# Altium PCB PCB3.PcbDoc (part 2 of 3)
Units mil, origin at the board's own origin, x right, y up, seen from the top; angles counter-clockwise.
Board outline 3693.31 x 2873.7 mil, 2 copper layers (Top Layer, Bottom Layer); 240 components, 0 nets, 816 pads, 396 vias.
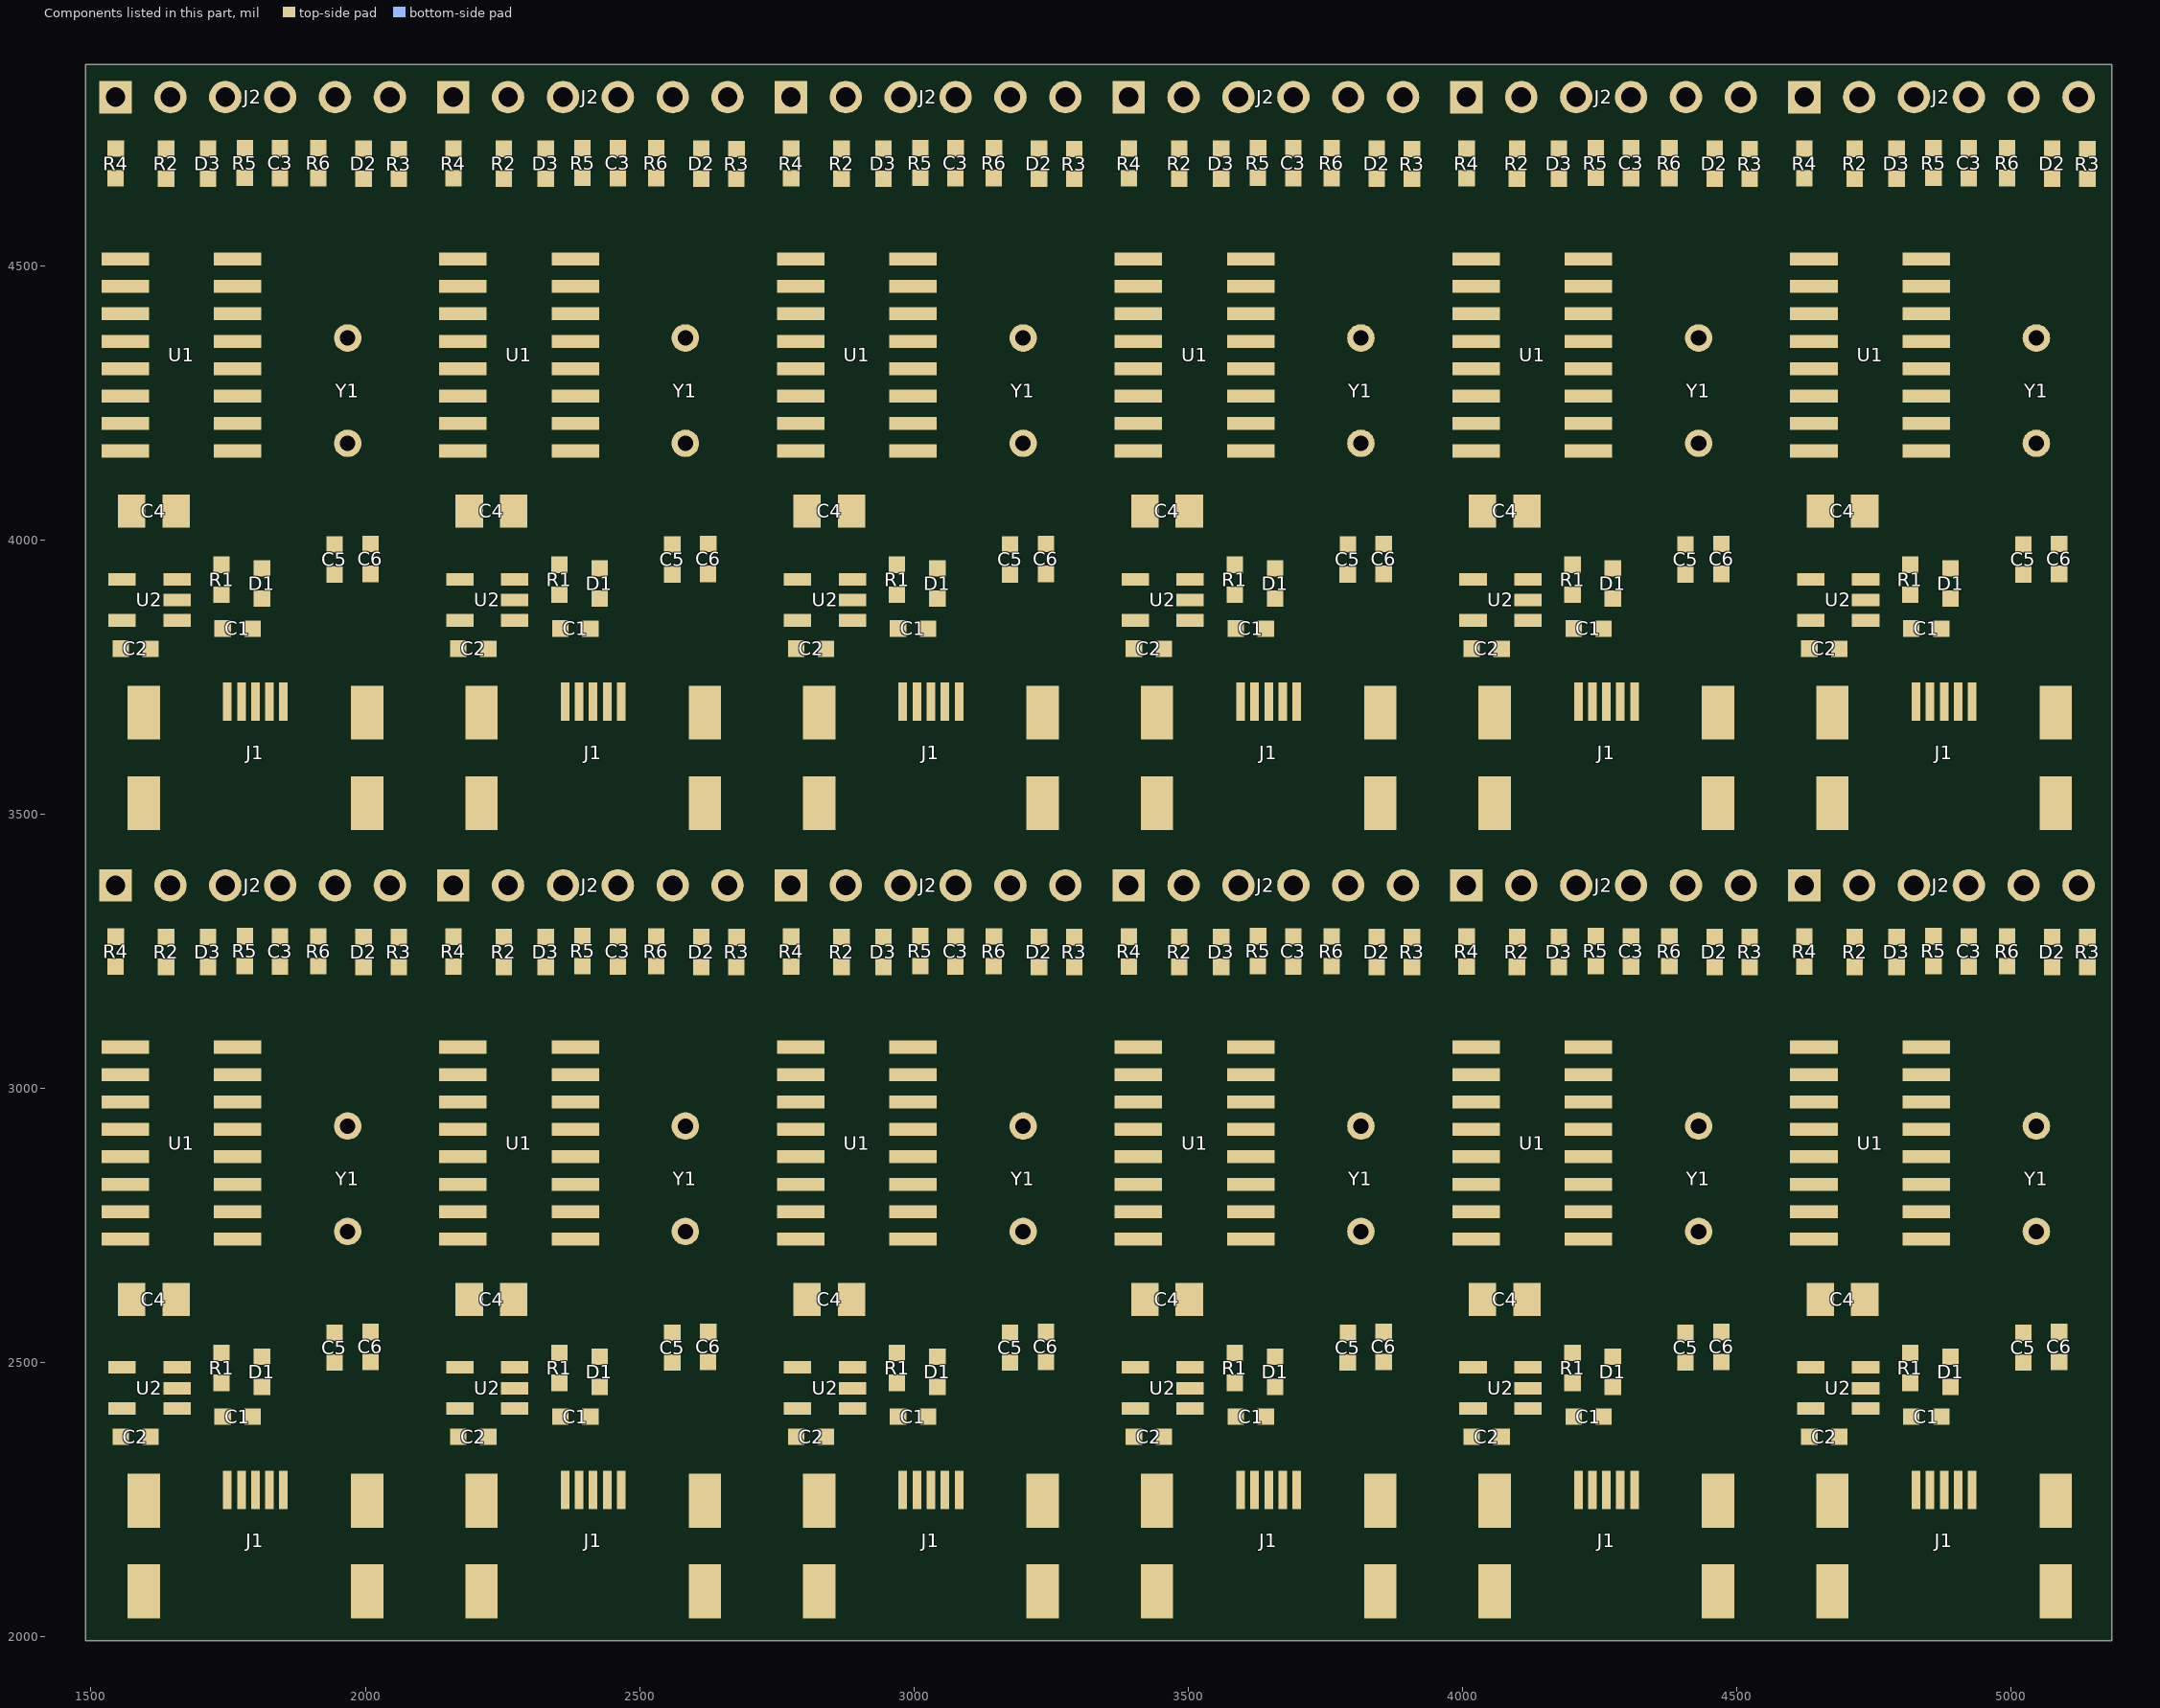
[diagram p2: the components of this part, seen from the top]

## Via types
v1: diameter 20, hole 10, Top Layer to Bottom Layer, tented both sides, 348 vias
v2: diameter 30, hole 15, Top Layer to Bottom Layer, tented both sides, 48 vias

## Nets (pads, with @x,y where several pads share a name; then routed paths per layer and width w, separated by ;. In a path a pad name is that pad's centre, name@x,y a point inside that pad or via, vN(x,y) a via of type N, cw(c..) or ccw(c..) an arc to the next point about the centre after c; other vN are vias at no path point) (continued)
copper on no net: | length 126987.4
  Top Layer w10: 1713.22,3221.43 1713.22,3205.38 1638.84,3131 1638.84,2801 1664.63,2775.22 1767.13,2775.22 ; 1713.22,4658.28 1713.22,4642.22 1638.84,4567.85 1638.84,4237.85 1664.63,4212.06 1767.13,4212.06 ; 1767.13,2825.22 1679.76,2825.22 1662.01,2842.97 1662.01,3117.01 1715.18,3170.18 1891.05,3170.18 1914.47,3193.59 1914.47,3222.65 ; 1767.13,2875.22 1708.16,2875.22 1684.51,2898.87 1684.51,3102.01 1722,3139.5 v1(1873.07,3139.5) ; 1767.13,2925.22 1859.94,2925.22 1883.5,2901.65 1883.5,2351.8 1872.36,2340.66 1811.2,2340.66 1799.74,2329.2 1799.74,2268.13 ; 1767.13,2975.22 1768.92,2977.01 v2(1834.63,2977.01) ; 1767.13,4262.06 1679.76,4262.06 1662.01,4279.82 1662.01,4553.85 1715.18,4607.02 1891.05,4607.02 1914.47,4630.44 1914.47,4659.5 ; 1767.13,4312.06 1708.16,4312.06 1684.51,4335.72 1684.51,4538.86 1722,4576.35 v1(1873.07,4576.35) ; 1767.13,4362.06 1859.94,4362.06 1883.5,4338.5 1883.5,3788.65 1872.36,3777.51 1811.2,3777.51 1799.74,3766.05 1799.74,3704.97 ; 1767.13,4412.06 1768.92,4413.86 v2(1834.63,4413.86) ; 1774.15,2268.13 1774.15,2351.97 1787.44,2365.25 1835.92,2365.25 1852.67,2382 v1(1852.67,2896.03) ; 1774.15,3704.97 1774.15,3788.82 1787.44,3802.1 1835.92,3802.1 1852.67,3818.85 v1(1852.67,4332.88) ; 1844.57,3222.46 1848,3219.03 v1(1873.45,3219.03) ; 1844.57,4659.31 1848,4655.87 v1(1873.45,4655.87) ; 2328.77,3221.43 2328.77,3205.38 2254.39,3131 2254.39,2801 2280.18,2775.22 2382.68,2775.22 ; 2328.77,4658.28 2328.77,4642.22 2254.39,4567.85 2254.39,4237.85 2280.18,4212.06 2382.68,4212.06 ; 2382.68,2825.22 2295.32,2825.22 2277.56,2842.97 2277.56,3117.01 2330.73,3170.18 2506.6,3170.18 2530.02,3193.59 2530.02,3222.65 ; 2382.68,2875.22 2323.71,2875.22 2300.06,2898.87 2300.06,3102.01 2337.55,3139.5 v1(2488.62,3139.5) ; 2382.68,2925.22 2475.49,2925.22 2499.06,2901.65 2499.06,2351.8 2487.91,2340.66 2426.75,2340.66 2415.3,2329.2 2415.3,2268.13 ; 2382.68,2975.22 2384.48,2977.01 v2(2450.18,2977.01) ; 2382.68,4262.06 2295.32,4262.06 2277.56,4279.82 2277.56,4553.85 2330.73,4607.02 2506.6,4607.02 2530.02,4630.44 2530.02,4659.5 ; 2382.68,4312.06 2323.71,4312.06 2300.06,4335.72 2300.06,4538.86 2337.55,4576.35 v1(2488.62,4576.35) ; 2382.68,4362.06 2475.49,4362.06 2499.06,4338.5 2499.06,3788.65 2487.91,3777.51 2426.75,3777.51 2415.3,3766.05 2415.3,3704.97 ; 2382.68,4412.06 2384.48,4413.86 v2(2450.18,4413.86) ; 2389.7,2268.13 2389.7,2351.97 2402.99,2365.25 2451.47,2365.25 2468.22,2382 v1(2468.22,2896.03) ; 2389.7,3704.97 2389.7,3788.82 2402.99,3802.1 2451.47,3802.1 2468.22,3818.85 v1(2468.22,4332.88) ; 2460.12,3222.46 2463.55,3219.03 v1(2489.01,3219.03) ; 2460.12,4659.31 2463.55,4655.87 v1(2489.01,4655.87) ; 2944.32,3221.43 2944.32,3205.38 2869.95,3131 2869.95,2801 2895.73,2775.22 2998.23,2775.22 ; 2944.32,4658.28 2944.32,4642.22 2869.95,4567.85 2869.95,4237.85 2895.73,4212.06 2998.23,4212.06 ; 2998.23,2825.22 2910.87,2825.22 2893.11,2842.97 2893.11,3117.01 2946.28,3170.18 3122.16,3170.18 3145.57,3193.59 3145.57,3222.65 ; 2998.23,2875.22 2939.26,2875.22 2915.61,2898.87 2915.61,3102.01 2953.1,3139.5 v1(3104.17,3139.5) ; 2998.23,2925.22 3091.04,2925.22 3114.61,2901.65 3114.61,2351.8 3103.46,2340.66 3042.3,2340.66 3030.85,2329.2 3030.85,2268.13 ; 2998.23,2975.22 3000.03,2977.01 v2(3065.74,2977.01) ; 2998.23,4262.06 2910.87,4262.06 2893.11,4279.82 2893.11,4553.85 2946.28,4607.02 3122.16,4607.02 3145.57,4630.44 3145.57,4659.5 ; 2998.23,4312.06 2939.26,4312.06 2915.61,4335.72 2915.61,4538.86 2953.1,4576.35 v1(3104.17,4576.35) ; 2998.23,4362.06 3091.04,4362.06 3114.61,4338.5 3114.61,3788.65 3103.46,3777.51 3042.3,3777.51 3030.85,3766.05 3030.85,3704.97 ; 2998.23,4412.06 3000.03,4413.86 v2(3065.74,4413.86) ; 3005.26,2268.13 3005.26,2351.97 3018.54,2365.25 3067.03,2365.25 3083.77,2382 v1(3083.77,2896.03) ; 3005.26,3704.97 3005.26,3788.82 3018.54,3802.1 3067.03,3802.1 3083.77,3818.85 v1(3083.77,4332.88) ; 3075.68,3222.46 3079.11,3219.03 v1(3104.56,3219.03) ; 3075.68,4659.31 3079.11,4655.87 v1(3104.56,4655.87) ; 3559.87,3221.43 3559.87,3205.38 3485.5,3131 3485.5,2801 3511.28,2775.22 3613.79,2775.22 ; 3559.87,4658.28 3559.87,4642.22 3485.5,4567.85 3485.5,4237.85 3511.28,4212.06 3613.79,4212.06 ; 3613.79,2825.22 3526.42,2825.22 3508.66,2842.97 3508.66,3117.01 3561.84,3170.18 3737.71,3170.18 3761.12,3193.59 3761.12,3222.65 ; 3613.79,2875.22 3554.81,2875.22 3531.16,2898.87 3531.16,3102.01 3568.65,3139.5 v1(3719.72,3139.5) ; 3613.79,2925.22 3706.59,2925.22 3730.16,2901.65 3730.16,2351.8 3719.02,2340.66 3657.86,2340.66 3646.4,2329.2 3646.4,2268.13 ; 3613.79,2975.22 3615.58,2977.01 v2(3681.29,2977.01) ; 3613.79,4262.06 3526.42,4262.06 3508.66,4279.82 3508.66,4553.85 3561.84,4607.02 3737.71,4607.02 3761.12,4630.44 3761.12,4659.5 ; 3613.79,4312.06 3554.81,4312.06 3531.16,4335.72 3531.16,4538.86 3568.65,4576.35 v1(3719.72,4576.35) ; 3613.79,4362.06 3706.59,4362.06 3730.16,4338.5 3730.16,3788.65 3719.02,3777.51 3657.86,3777.51 3646.4,3766.05 3646.4,3704.97 ; 3613.79,4412.06 3615.58,4413.86 v2(3681.29,4413.86) ; 3620.81,2268.13 3620.81,2351.97 3634.09,2365.25 3682.58,2365.25 3699.32,2382 v1(3699.32,2896.03) ; 3620.81,3704.97 3620.81,3788.82 3634.09,3802.1 3682.58,3802.1 3699.32,3818.85 v1(3699.32,4332.88) ; 3691.23,3222.46 3694.66,3219.03 v1(3720.11,3219.03) ; 3691.23,4659.31 3694.66,4655.87 v1(3720.11,4655.87) ; 4175.43,3221.43 4175.43,3205.38 4101.05,3131 4101.05,2801 4126.84,2775.22 4229.34,2775.22 ; 4175.43,4658.28 4175.43,4642.22 4101.05,4567.85 4101.05,4237.85 4126.84,4212.06 4229.34,4212.06 ; 4229.34,2825.22 4141.97,2825.22 4124.22,2842.97 4124.22,3117.01 4177.39,3170.18 4353.26,3170.18 4376.68,3193.59 4376.68,3222.65 ; 4229.34,2875.22 4170.36,2875.22 4146.71,2898.87 4146.71,3102.01 4184.2,3139.5 v1(4335.28,3139.5) ; 4229.34,2925.22 4322.15,2925.22 4345.71,2901.65 4345.71,2351.8 4334.57,2340.66 4273.41,2340.66 4261.95,2329.2 4261.95,2268.13 ; 4229.34,2975.22 4231.13,2977.01 v2(4296.84,2977.01) ; 4229.34,4262.06 4141.97,4262.06 4124.22,4279.82 4124.22,4553.85 4177.39,4607.02 4353.26,4607.02 4376.68,4630.44 4376.68,4659.5 ; 4229.34,4312.06 4170.36,4312.06 4146.71,4335.72 4146.71,4538.86 4184.2,4576.35 v1(4335.28,4576.35) ; 4229.34,4362.06 4322.15,4362.06 4345.71,4338.5 4345.71,3788.65 4334.57,3777.51 4273.41,3777.51 4261.95,3766.05 4261.95,3704.97 ; 4229.34,4412.06 4231.13,4413.86 v2(4296.84,4413.86) ; 4236.36,2268.13 4236.36,2351.97 4249.65,2365.25 4298.13,2365.25 4314.88,2382 v1(4314.88,2896.03) ; 4236.36,3704.97 4236.36,3788.82 4249.65,3802.1 4298.13,3802.1 4314.88,3818.85 v1(4314.88,4332.88) ; 4306.78,3222.46 4310.21,3219.03 v1(4335.66,3219.03) ; 4306.78,4659.31 4310.21,4655.87 v1(4335.66,4655.87) ; 4790.98,3221.43 4790.98,3205.38 4716.6,3131 4716.6,2801 4742.39,2775.22 4844.89,2775.22 ; 4790.98,4658.28 4790.98,4642.22 4716.6,4567.85 4716.6,4237.85 4742.39,4212.06 4844.89,4212.06 ; 4844.89,2825.22 4757.52,2825.22 4739.77,2842.97 4739.77,3117.01 4792.94,3170.18 4968.81,3170.18 4992.23,3193.59 4992.23,3222.65 ; 4844.89,2875.22 4785.92,2875.22 4762.27,2898.87 4762.27,3102.01 4799.76,3139.5 v1(4950.83,3139.5) ; 4844.89,2925.22 4937.7,2925.22 4961.26,2901.65 4961.26,2351.8 4950.12,2340.66 4888.96,2340.66 4877.5,2329.2 4877.5,2268.13 ; 4844.89,2975.22 4846.69,2977.01 v2(4912.39,2977.01) ; 4844.89,4262.06 4757.52,4262.06 4739.77,4279.82 4739.77,4553.85 4792.94,4607.02 4968.81,4607.02 4992.23,4630.44 4992.23,4659.5 ; 4844.89,4312.06 4785.92,4312.06 4762.27,4335.72 4762.27,4538.86 4799.76,4576.35 v1(4950.83,4576.35) ; 4844.89,4362.06 4937.7,4362.06 4961.26,4338.5 4961.26,3788.65 4950.12,3777.51 4888.96,3777.51 4877.5,3766.05 4877.5,3704.97 ; 4844.89,4412.06 4846.69,4413.86 v2(4912.39,4413.86) ; 4851.91,2268.13 4851.91,2351.97 4865.2,2365.25 4913.68,2365.25 4930.43,2382 v1(4930.43,2896.03) ; 4851.91,3704.97 4851.91,3788.82 4865.2,3802.1 4913.68,3802.1 4930.43,3818.85 v1(4930.43,4332.88) ; 4922.33,3222.46 4925.76,3219.03 v1(4951.21,3219.03) ; 4922.33,4659.31 4925.76,4655.87 v1(4951.21,4655.87)
  Top Layer w20: 1544.74,3370.22 1545.11,3369.85 1545.11,3276.65 ; 1544.74,4807.07 1545.11,4806.69 1545.11,4713.5 ; 1545.05,3222.15 1571.63,3195.57 1571.63,3144.43 v1(1572.9,3143.16) ; 1545.05,4659 1571.63,4632.42 1571.63,4581.28 v1(1572.9,4580.01) ; 1554.12,2364.73 1554.12,2413.74 1556.75,2416.38 1555.67,2417.45 v2(1555.67,2439.94) ; 1554.12,3801.58 1554.12,3850.59 1556.75,3853.22 1555.67,3854.3 v2(1555.67,3876.78) ; 1556.26,2567.62 1574.08,2585.44 ; 1556.26,4004.47 1574.08,4022.29 ; 1574.08,2615.53 1574.08,2645.99 v1(1609.63,2681.55) ; 1574.08,4052.37 1574.08,4082.84 v1(1609.63,4118.4) ; v1(1609.63,3272.71) 1633.6,3272.71 1636.91,3276.02 1644.54,3276.02 1738.74,3370.22 1744.74,3370.22 ; v1(1609.63,4709.56) 1633.6,4709.56 1636.91,4712.87 1644.54,4712.87 1738.74,4807.07 1744.74,4807.07 ; 1636.06,2725.22 1562.41,2725.22 1651.81,2725.22 v1(1652.32,2724.72) ; 1636.06,4162.06 1562.41,4162.06 1651.81,4162.06 v1(1652.32,4161.56) ; 1636.85,3221.52 1649.86,3221.52 1704.77,3276.43 1713.22,3276.43 ; 1636.85,4658.37 1649.86,4658.37 1704.77,4713.28 1713.22,4713.28 ; v1(1654.94,2533.7) 1654.94,2493.18 1656.75,2491.38 ; v1(1654.94,3970.55) 1654.94,3930.03 1656.75,3928.22 ; 1713.22,3221.43 1778.81,3221.43 ; 1713.22,4658.28 1778.81,4658.28 ; 1737.95,2463.1 1737.95,2403.52 1740.02,2401.44 ; 1737.95,3899.95 1737.95,3840.37 1740.02,3838.29 ; 1738.01,2517.6 1805.04,2517.6 1811.58,2511.06 ; 1738.01,3954.45 1805.04,3954.45 1811.58,3947.91 ; 1767.13,3025.22 1878.1,3025.22 1906.5,2996.81 1906.5,2904.54 1967.85,2843.19 1967.85,2741.73 1967.85,2739.15 1967.85,2669.68 1944.03,2645.85 1944.03,2554.66 ; 1767.13,3075.22 1924.84,3075.22 1967.85,3032.2 1967.85,2931.28 2010.85,2888.28 2010.85,2557.2 2009.42,2555.76 ; 1767.13,4462.06 1878.1,4462.06 1906.5,4433.66 1906.5,4341.39 1967.85,4280.04 1967.85,4178.58 1967.85,4176 1967.85,4106.52 1944.03,4082.7 1944.03,3991.5 ; 1767.13,4512.06 1924.84,4512.06 1967.85,4469.05 1967.85,4368.13 2010.85,4325.13 2010.85,3994.05 2009.42,3992.61 ; 1780.39,3277.46 1780.39,3291.19 1844.74,3355.54 1844.74,3370.22 ; 1780.39,4714.3 1780.39,4728.04 1844.74,4792.38 1844.74,4807.07 ; 1794.52,2401.38 1811.58,2418.43 1811.58,2456.06 ; 1794.52,3838.23 1811.58,3855.28 1811.58,3892.91 ; v1(1815.19,3256.15) 1823.83,3256.15 1844.63,3276.96 1844.63,3299.9 v1(1865.55,3320.82) ; v1(1815.19,4693) 1823.83,4693 1844.63,4713.81 1844.63,4736.75 v1(1865.55,4757.67) ; 1834.15,2268.13 1850.92,2268.13 ; 1834.15,3704.97 1850.92,3704.97 ; 1914.47,3222.65 1995.5,3222.65 1996.87,3221.28 ; 1914.47,4659.5 1995.5,4659.5 1996.87,4658.13 ; 1914.53,3277.15 1914.53,3340.02 1944.74,3370.22 ; 1914.53,4714 1914.53,4776.86 1944.74,4807.07 ; 1996.87,3276.28 2060.44,3276.28 2060.94,3275.79 ; 1996.87,4713.13 2060.44,4713.13 2060.94,4712.63 ; v2(2059.73,3139.21) 2060.88,3140.36 2060.88,3221.29 ; v2(2059.73,4576.06) 2060.88,4577.2 2060.88,4658.13 ; 2160.29,3370.22 2160.66,3369.85 2160.66,3276.65 ; 2160.29,4807.07 2160.66,4806.69 2160.66,4713.5 ; 2160.6,3222.15 2187.18,3195.57 2187.18,3144.43 v1(2188.45,3143.16) ; 2160.6,4659 2187.18,4632.42 2187.18,4581.28 v1(2188.45,4580.01) ; 2169.67,2364.73 2169.67,2413.74 2172.3,2416.38 2171.23,2417.45 v2(2171.23,2439.94) ; 2169.67,3801.58 2169.67,3850.59 2172.3,3853.22 2171.23,3854.3 v2(2171.23,3876.78) ; 2171.81,2567.62 2189.63,2585.44 ; 2171.81,4004.47 2189.63,4022.29 ; 2189.63,2615.53 2189.63,2645.99 v1(2225.18,2681.55) ; 2189.63,4052.37 2189.63,4082.84 v1(2225.18,4118.4) ; v1(2225.18,3272.71) 2249.15,3272.71 2252.46,3276.02 2260.09,3276.02 2354.29,3370.22 2360.29,3370.22 ; v1(2225.18,4709.56) 2249.15,4709.56 2252.46,4712.87 2260.09,4712.87 2354.29,4807.07 2360.29,4807.07 ; 2251.61,2725.22 2177.96,2725.22 2267.36,2725.22 v1(2267.87,2724.72) ; 2251.61,4162.06 2177.96,4162.06 2267.36,4162.06 v1(2267.87,4161.56) ; 2252.4,3221.52 2265.41,3221.52 2320.32,3276.43 2328.77,3276.43 ; 2252.4,4658.37 2265.41,4658.37 2320.32,4713.28 2328.77,4713.28 ; v1(2270.49,2533.7) 2270.49,2493.18 2272.3,2491.38 ; v1(2270.49,3970.55) 2270.49,3930.03 2272.3,3928.22 ; 2328.77,3221.43 2394.36,3221.43 ; 2328.77,4658.28 2394.36,4658.28 ; 2353.5,2463.1 2353.5,2403.52 2355.58,2401.44 ; 2353.5,3899.95 2353.5,3840.37 2355.58,3838.29 ; 2353.56,2517.6 2420.59,2517.6 2427.13,2511.06 ; 2353.56,3954.45 2420.59,3954.45 2427.13,3947.91 ; 2382.68,3025.22 2493.65,3025.22 2522.06,2996.81 2522.06,2904.54 2583.41,2843.19 2583.41,2741.73 2583.41,2739.15 2583.41,2669.68 2559.58,2645.85 2559.58,2554.66 ; 2382.68,3075.22 2540.39,3075.22 2583.41,3032.2 2583.41,2931.28 2626.41,2888.28 2626.41,2557.2 2624.97,2555.76 ; 2382.68,4462.06 2493.65,4462.06 2522.06,4433.66 2522.06,4341.39 2583.41,4280.04 2583.41,4178.58 2583.41,4176 2583.41,4106.52 2559.58,4082.7 2559.58,3991.5 ; 2382.68,4512.06 2540.39,4512.06 2583.41,4469.05 2583.41,4368.13 2626.41,4325.13 2626.41,3994.05 2624.97,3992.61 ; 2395.95,3277.46 2395.95,3291.19 2460.29,3355.54 2460.29,3370.22 ; 2395.95,4714.3 2395.95,4728.04 2460.29,4792.38 2460.29,4807.07 ; 2410.08,2401.38 2427.13,2418.43 2427.13,2456.06 ; 2410.08,3838.23 2427.13,3855.28 2427.13,3892.91 ; v1(2430.74,3256.15) 2439.38,3256.15 2460.19,3276.96 2460.19,3299.9 v1(2481.11,3320.82) ; v1(2430.74,4693) 2439.38,4693 2460.19,4713.81 2460.19,4736.75 v1(2481.11,4757.67) ; 2449.7,2268.13 2466.48,2268.13 ; 2449.7,3704.97 2466.48,3704.97 ; 2530.02,3222.65 2611.05,3222.65 2612.42,3221.28 ; 2530.02,4659.5 2611.05,4659.5 2612.42,4658.13 ; 2530.08,3277.15 2530.08,3340.02 2560.29,3370.22 ; 2530.08,4714 2530.08,4776.86 2560.29,4807.07 ; 2612.42,3276.28 2675.99,3276.28 2676.49,3275.79 ; 2612.42,4713.13 2675.99,4713.13 2676.49,4712.63 ; v2(2675.28,3139.21) 2676.43,3140.36 2676.43,3221.29 ; v2(2675.28,4576.06) 2676.43,4577.2 2676.43,4658.13 ; 2775.84,3370.22 2776.22,3369.85 2776.22,3276.65 ; 2775.84,4807.07 2776.22,4806.69 2776.22,4713.5 ; 2776.15,3222.15 2802.73,3195.57 2802.73,3144.43 v1(2804.01,3143.16) ; 2776.15,4659 2802.73,4632.42 2802.73,4581.28 v1(2804.01,4580.01) ; 2785.22,2364.73 2785.22,2413.74 2787.86,2416.38 2786.78,2417.45 v2(2786.78,2439.94) ; 2785.22,3801.58 2785.22,3850.59 2787.86,3853.22 2786.78,3854.3 v2(2786.78,3876.78) ; 2787.36,2567.62 2805.18,2585.44 ; 2787.36,4004.47 2805.18,4022.29 ; 2805.18,2615.53 2805.18,2645.99 v1(2840.74,2681.55) ; 2805.18,4052.37 2805.18,4082.84 v1(2840.74,4118.4) ; v1(2840.74,3272.71) 2864.7,3272.71 2868.01,3276.02 2875.64,3276.02 2969.85,3370.22 2975.84,3370.22 ; v1(2840.74,4709.56) 2864.7,4709.56 2868.01,4712.87 2875.64,4712.87 2969.85,4807.07 2975.84,4807.07 ; 2867.16,2725.22 2793.51,2725.22 2882.92,2725.22 v1(2883.42,2724.72) ; 2867.16,4162.06 2793.51,4162.06 2882.92,4162.06 v1(2883.42,4161.56) ; 2867.95,3221.52 2880.96,3221.52 2935.87,3276.43 2944.32,3276.43 ; 2867.95,4658.37 2880.96,4658.37 2935.87,4713.28 2944.32,4713.28 ; v1(2886.05,2533.7) 2886.05,2493.18 2887.86,2491.38 ; v1(2886.05,3970.55) 2886.05,3930.03 2887.86,3928.22 ; 2944.32,3221.43 3009.91,3221.43 ; 2944.32,4658.28 3009.91,4658.28 ; 2969.05,2463.1 2969.05,2403.52 2971.13,2401.44 ; 2969.05,3899.95 2969.05,3840.37 2971.13,3838.29 ; 2969.12,2517.6 3036.14,2517.6 3042.68,2511.06 ; 2969.12,3954.45 3036.14,3954.45 3042.68,3947.91 ; 2998.23,3025.22 3109.2,3025.22 3137.61,2996.81 3137.61,2904.54 3198.96,2843.19 3198.96,2741.73 3198.96,2739.15 3198.96,2669.68 3175.13,2645.85 3175.13,2554.66 ; 2998.23,3075.22 3155.94,3075.22 3198.96,3032.2 3198.96,2931.28 3241.96,2888.28 3241.96,2557.2 3240.52,2555.76 ; 2998.23,4462.06 3109.2,4462.06 3137.61,4433.66 3137.61,4341.39 3198.96,4280.04 3198.96,4178.58 3198.96,4176 3198.96,4106.52 3175.13,4082.7 3175.13,3991.5 ; 2998.23,4512.06 3155.94,4512.06 3198.96,4469.05 3198.96,4368.13 3241.96,4325.13 3241.96,3994.05 3240.52,3992.61 ; 3011.5,3277.46 3011.5,3291.19 3075.84,3355.54 3075.84,3370.22 ; 3011.5,4714.3 3011.5,4728.04 3075.84,4792.38 3075.84,4807.07 ; 3025.63,2401.38 3042.68,2418.43 3042.68,2456.06 ; 3025.63,3838.23 3042.68,3855.28 3042.68,3892.91 ; v1(3046.3,3256.15) 3054.93,3256.15 3075.74,3276.96 3075.74,3299.9 v1(3096.66,3320.82) ; v1(3046.3,4693) 3054.93,4693 3075.74,4713.81 3075.74,4736.75 v1(3096.66,4757.67) ; 3065.26,2268.13 3082.03,2268.13 ; 3065.26,3704.97 3082.03,3704.97 ; 3145.57,3222.65 3226.61,3222.65 3227.97,3221.28 ; 3145.57,4659.5 3226.61,4659.5 3227.97,4658.13 ; 3145.64,3277.15 3145.64,3340.02 3175.84,3370.22 ; 3145.64,4714 3145.64,4776.86 3175.84,4807.07 ; 3227.97,3276.28 3291.55,3276.28 3292.04,3275.79 ; 3227.97,4713.13 3291.55,4713.13 3292.04,4712.63 ; v2(3290.84,3139.21) 3291.98,3140.36 3291.98,3221.29 ; v2(3290.84,4576.06) 3291.98,4577.2 3291.98,4658.13 ; 3391.39,3370.22 3391.77,3369.85 3391.77,3276.65 ; 3391.39,4807.07 3391.77,4806.69 3391.77,4713.5 ; 3391.7,3222.15 3418.29,3195.57 3418.29,3144.43 v1(3419.56,3143.16) ; 3391.7,4659 3418.29,4632.42 3418.29,4581.28 v1(3419.56,4580.01) ; 3400.78,2364.73 3400.78,2413.74 3403.41,2416.38 3402.33,2417.45 v2(3402.33,2439.94) ; 3400.78,3801.58 3400.78,3850.59 3403.41,3853.22 3402.33,3854.3 v2(3402.33,3876.78) ; 3402.91,2567.62 3420.73,2585.44 ; 3402.91,4004.47 3420.73,4022.29 ; 3420.73,2615.53 3420.73,2645.99 v1(3456.29,2681.55) ; 3420.73,4052.37 3420.73,4082.84 v1(3456.29,4118.4) ; v1(3456.29,3272.71) 3480.25,3272.71 3483.57,3276.02 3491.2,3276.02 3585.4,3370.22 3591.39,3370.22 ; v1(3456.29,4709.56) 3480.25,4709.56 3483.57,4712.87 3491.2,4712.87 3585.4,4807.07 3591.39,4807.07 ; 3482.72,2725.22 3409.06,2725.22 3498.47,2725.22 v1(3498.97,2724.72) ; 3482.72,4162.06 3409.06,4162.06 3498.47,4162.06 v1(3498.97,4161.56) ; 3483.5,3221.52 3496.51,3221.52 3551.42,3276.43 3559.87,3276.43 ; 3483.5,4658.37 3496.51,4658.37 3551.42,4713.28 3559.87,4713.28 ; v1(3501.6,2533.7) 3501.6,2493.18 3503.41,2491.38 ; v1(3501.6,3970.55) 3501.6,3930.03 3503.41,3928.22 ; 3559.87,3221.43 3625.46,3221.43 ; 3559.87,4658.28 3625.46,4658.28 ; 3584.6,2463.1 3584.6,2403.52 3586.68,2401.44 ; 3584.6,3899.95 3584.6,3840.37 3586.68,3838.29 ; 3584.67,2517.6 3651.69,2517.6 3658.24,2511.06 ; 3584.67,3954.45 3651.69,3954.45 3658.24,3947.91 ; 3613.79,3025.22 3724.76,3025.22 3753.16,2996.81 3753.16,2904.54 3814.51,2843.19 3814.51,2741.73 3814.51,2739.15 3814.51,2669.68 3790.68,2645.85 3790.68,2554.66 ; 3613.79,3075.22 3771.49,3075.22 3814.51,3032.2 3814.51,2931.28 3857.51,2888.28 3857.51,2557.2 3856.07,2555.76 ; 3613.79,4462.06 3724.76,4462.06 3753.16,4433.66 3753.16,4341.39 3814.51,4280.04 3814.51,4178.58 3814.51,4176 3814.51,4106.52 3790.68,4082.7 3790.68,3991.5 ; 3613.79,4512.06 3771.49,4512.06 3814.51,4469.05 3814.51,4368.13 3857.51,4325.13 3857.51,3994.05 3856.07,3992.61 ; 3627.05,3277.46 3627.05,3291.19 3691.39,3355.54 3691.39,3370.22 ; 3627.05,4714.3 3627.05,4728.04 3691.39,4792.38 3691.39,4807.07 ; 3641.18,2401.38 3658.24,2418.43 3658.24,2456.06 ; 3641.18,3838.23 3658.24,3855.28 3658.24,3892.91 ; v1(3661.85,3256.15) 3670.49,3256.15 3691.29,3276.96 3691.29,3299.9 v1(3712.21,3320.82) ; v1(3661.85,4693) 3670.49,4693 3691.29,4713.81 3691.29,4736.75 v1(3712.21,4757.67) ; 3680.81,2268.13 3697.58,2268.13 ; 3680.81,3704.97 3697.58,3704.97 ; 3761.12,3222.65 3842.16,3222.65 3843.53,3221.28 ; 3761.12,4659.5 3842.16,4659.5 3843.53,4658.13 ; 3761.19,3277.15 3761.19,3340.02 3791.39,3370.22 ; 3761.19,4714 3761.19,4776.86 3791.39,4807.07 ; 3843.53,3276.28 3907.1,3276.28 3907.6,3275.79 ; 3843.53,4713.13 3907.1,4713.13 3907.6,4712.63 ; v2(3906.39,3139.21) 3907.53,3140.36 3907.53,3221.29 ; v2(3906.39,4576.06) 3907.53,4577.2 3907.53,4658.13 ; 4006.95,3370.22 4007.32,3369.85 4007.32,3276.65 ; 4006.95,4807.07 4007.32,4806.69 4007.32,4713.5 ; 4007.26,3222.15 4033.84,3195.57 4033.84,3144.43 v1(4035.11,3143.16) ; 4007.26,4659 4033.84,4632.42 4033.84,4581.28 v1(4035.11,4580.01) ; 4016.33,2364.73 4016.33,2413.74 4018.96,2416.38 4017.88,2417.45 v2(4017.88,2439.94) ; 4016.33,3801.58 4016.33,3850.59 4018.96,3853.22 4017.88,3854.3 v2(4017.88,3876.78) ; 4018.47,2567.62 4036.28,2585.44 ; 4018.47,4004.47 4036.28,4022.29 ; 4036.28,2615.53 4036.28,2645.99 v1(4071.84,2681.55) ; 4036.28,4052.37 4036.28,4082.84 v1(4071.84,4118.4) ; v1(4071.84,3272.71) 4095.8,3272.71 4099.12,3276.02 4106.75,3276.02 4200.95,3370.22 4206.94,3370.22 ; v1(4071.84,4709.56) 4095.8,4709.56 4099.12,4712.87 4106.75,4712.87 4200.95,4807.07 4206.94,4807.07 ; 4098.27,2725.22 4024.61,2725.22 4114.02,2725.22 v1(4114.52,2724.72) ; 4098.27,4162.06 4024.61,4162.06 4114.02,4162.06 v1(4114.52,4161.56) ; 4099.05,3221.52 4112.06,3221.52 4166.98,3276.43 4175.43,3276.43 ; 4099.05,4658.37 4112.06,4658.37 4166.98,4713.28 4175.43,4713.28 ; v1(4117.15,2533.7) 4117.15,2493.18 4118.96,2491.38 ; v1(4117.15,3970.55) 4117.15,3930.03 4118.96,3928.22 ; 4175.43,3221.43 4241.01,3221.43 ; 4175.43,4658.28 4241.01,4658.28 ; 4200.16,2463.1 4200.16,2403.52 4202.23,2401.44 ; 4200.16,3899.95 4200.16,3840.37 4202.23,3838.29 ; 4200.22,2517.6 4267.25,2517.6 4273.79,2511.06 ; 4200.22,3954.45 4267.25,3954.45 4273.79,3947.91 ; 4229.34,3025.22 4340.31,3025.22 4368.71,2996.81 4368.71,2904.54 4430.06,2843.19 4430.06,2741.73 4430.06,2739.15 4430.06,2669.68 4406.23,2645.85 4406.23,2554.66 ; 4229.34,3075.22 4387.04,3075.22 4430.06,3032.2 4430.06,2931.28 4473.06,2888.28 4473.06,2557.2 4471.63,2555.76 ; 4229.34,4462.06 4340.31,4462.06 4368.71,4433.66 4368.71,4341.39 4430.06,4280.04 4430.06,4178.58 4430.06,4176 4430.06,4106.52 4406.23,4082.7 4406.23,3991.5 ; 4229.34,4512.06 4387.04,4512.06 4430.06,4469.05 4430.06,4368.13 4473.06,4325.13 4473.06,3994.05 4471.63,3992.61 ; 4242.6,3277.46 4242.6,3291.19 4306.94,3355.54 4306.94,3370.22 ; 4242.6,4714.3 4242.6,4728.04 4306.94,4792.38 4306.94,4807.07 ; 4256.73,2401.38 4273.79,2418.43 4273.79,2456.06 ; 4256.73,3838.23 4273.79,3855.28 4273.79,3892.91 ; v1(4277.4,3256.15) 4286.04,3256.15 4306.84,3276.96 4306.84,3299.9 v1(4327.76,3320.82) ; v1(4277.4,4693) 4286.04,4693 4306.84,4713.81 4306.84,4736.75 v1(4327.76,4757.67) ; 4296.36,2268.13 4313.13,2268.13 ; 4296.36,3704.97 4313.13,3704.97 ; 4376.68,3222.65 4457.71,3222.65 4459.08,3221.28 ; 4376.68,4659.5 4457.71,4659.5 4459.08,4658.13 ; 4376.74,3277.15 4376.74,3340.02 4406.94,3370.22 ; 4376.74,4714 4376.74,4776.86 4406.94,4807.07 ; 4459.08,3276.28 4522.65,3276.28 4523.15,3275.79 ; 4459.08,4713.13 4522.65,4713.13 4523.15,4712.63 ; v2(4521.94,3139.21) 4523.08,3140.36 4523.08,3221.29 ; v2(4521.94,4576.06) 4523.08,4577.2 4523.08,4658.13 ; 4622.5,3370.22 4622.87,3369.85 4622.87,3276.65 ; 4622.5,4807.07 4622.87,4806.69 4622.87,4713.5 ; 4622.81,3222.15 4649.39,3195.57 4649.39,3144.43 v1(4650.66,3143.16) ; 4622.81,4659 4649.39,4632.42 4649.39,4581.28 v1(4650.66,4580.01) ; 4631.88,2364.73 4631.88,2413.74 4634.51,2416.38 4633.43,2417.45 v2(4633.43,2439.94) ; 4631.88,3801.58 4631.88,3850.59 4634.51,3853.22 4633.43,3854.3 v2(4633.43,3876.78) ; 4634.02,2567.62 4651.84,2585.44 ; 4634.02,4004.47 4651.84,4022.29 ; 4651.84,2615.53 4651.84,2645.99 v1(4687.39,2681.55) ; 4651.84,4052.37 4651.84,4082.84 v1(4687.39,4118.4) ; v1(4687.39,3272.71) 4711.36,3272.71 4714.67,3276.02 4722.3,3276.02 4816.5,3370.22 4822.5,3370.22 ; v1(4687.39,4709.56) 4711.36,4709.56 4714.67,4712.87 4722.3,4712.87 4816.5,4807.07 4822.5,4807.07 ; 4713.82,2725.22 4640.17,2725.22 4729.57,2725.22 v1(4730.07,2724.72) ; 4713.82,4162.06 4640.17,4162.06 4729.57,4162.06 v1(4730.07,4161.56) ; 4714.61,3221.52 4727.61,3221.52 4782.53,3276.43 4790.98,3276.43 ; 4714.61,4658.37 4727.61,4658.37 4782.53,4713.28 4790.98,4713.28 ; v1(4732.7,2533.7) 4732.7,2493.18 4734.51,2491.38 ; v1(4732.7,3970.55) 4732.7,3930.03 4734.51,3928.22 ; 4790.98,3221.43 4856.57,3221.43 ; 4790.98,4658.28 4856.57,4658.28 ; 4815.71,2463.1 4815.71,2403.52 4817.78,2401.44 ; 4815.71,3899.95 4815.71,3840.37 4817.78,3838.29 ; 4815.77,2517.6 4882.8,2517.6 4889.34,2511.06 ; 4815.77,3954.45 4882.8,3954.45 4889.34,3947.91 ; 4844.89,3025.22 4955.86,3025.22 4984.26,2996.81 4984.26,2904.54 5045.61,2843.19 5045.61,2741.73 5045.61,2739.15 5045.61,2669.68 5021.79,2645.85 5021.79,2554.66 ; 4844.89,3075.22 5002.6,3075.22 5045.61,3032.2 5045.61,2931.28 5088.61,2888.28 5088.61,2557.2 5087.18,2555.76 ; 4844.89,4462.06 4955.86,4462.06 4984.26,4433.66 4984.26,4341.39 5045.61,4280.04 5045.61,4178.58 5045.61,4176 5045.61,4106.52 5021.79,4082.7 5021.79,3991.5 ; 4844.89,4512.06 5002.6,4512.06 5045.61,4469.05 5045.61,4368.13 5088.61,4325.13 5088.61,3994.05 5087.18,3992.61 ; 4858.15,3277.46 4858.15,3291.19 4922.5,3355.54 4922.5,3370.22 ; 4858.15,4714.3 4858.15,4728.04 4922.5,4792.38 4922.5,4807.07 ; 4872.28,2401.38 4889.34,2418.43 4889.34,2456.06 ; 4872.28,3838.23 4889.34,3855.28 4889.34,3892.91 ; v1(4892.95,3256.15) 4901.59,3256.15 4922.4,3276.96 4922.4,3299.9 v1(4943.31,3320.82) ; v1(4892.95,4693) 4901.59,4693 4922.4,4713.81 4922.4,4736.75 v1(4943.31,4757.67) ; 4911.91,2268.13 4928.68,2268.13 ; 4911.91,3704.97 4928.68,3704.97 ; 4992.23,3222.65 5073.26,3222.65 5074.63,3221.28 ; 4992.23,4659.5 5073.26,4659.5 5074.63,4658.13 ; 4992.29,3277.15 4992.29,3340.02 5022.5,3370.22 ; 4992.29,4714 4992.29,4776.86 5022.5,4807.07 ; 5074.63,3276.28 5138.2,3276.28 5138.7,3275.79 ; 5074.63,4713.13 5138.2,4713.13 5138.7,4712.63 ; v2(5137.49,3139.21) 5138.64,3140.36 5138.64,3221.29 ; v2(5137.49,4576.06) 5138.64,4577.2 5138.64,4658.13
  Bottom Layer w10: v2(1834.63,2977.01) 1848.1,2977.01 1852.67,2972.45 v1(1852.67,2896.03) ; v2(1834.63,4413.86) 1848.1,4413.86 1852.67,4409.29 v1(1852.67,4332.88) ; v1(1873.07,3139.5) 1873.45,3139.89 v1(1873.45,3219.03) ; v1(1873.07,4576.35) 1873.45,4576.73 v1(1873.45,4655.87) ; v2(2450.18,2977.01) 2463.65,2977.01 2468.22,2972.45 v1(2468.22,2896.03) ; v2(2450.18,4413.86) 2463.65,4413.86 2468.22,4409.29 v1(2468.22,4332.88) ; v1(2488.62,3139.5) 2489.01,3139.89 v1(2489.01,3219.03) ; v1(2488.62,4576.35) 2489.01,4576.73 v1(2489.01,4655.87) ; v2(3065.74,2977.01) 3079.21,2977.01 3083.77,2972.45 v1(3083.77,2896.03) ; v2(3065.74,4413.86) 3079.21,4413.86 3083.77,4409.29 v1(3083.77,4332.88) ; v1(3104.17,3139.5) 3104.56,3139.89 v1(3104.56,3219.03) ; v1(3104.17,4576.35) 3104.56,4576.73 v1(3104.56,4655.87) ; v2(3681.29,2977.01) 3694.76,2977.01 3699.32,2972.45 v1(3699.32,2896.03) ; v2(3681.29,4413.86) 3694.76,4413.86 3699.32,4409.29 v1(3699.32,4332.88) ; v1(3719.72,3139.5) 3720.11,3139.89 v1(3720.11,3219.03) ; v1(3719.72,4576.35) 3720.11,4576.73 v1(3720.11,4655.87) ; v2(4296.84,2977.01) 4310.31,2977.01 4314.88,2972.45 v1(4314.88,2896.03) ; v2(4296.84,4413.86) 4310.31,4413.86 4314.88,4409.29 v1(4314.88,4332.88) ; v1(4335.28,3139.5) 4335.66,3139.89 v1(4335.66,3219.03) ; v1(4335.28,4576.35) 4335.66,4576.73 v1(4335.66,4655.87) ; v2(4912.39,2977.01) 4925.86,2977.01 4930.43,2972.45 v1(4930.43,2896.03) ; v2(4912.39,4413.86) 4925.86,4413.86 4930.43,4409.29 v1(4930.43,4332.88) ; v1(4950.83,3139.5) 4951.21,3139.89 v1(4951.21,3219.03) ; v1(4950.83,4576.35) 4951.21,4576.73 v1(4951.21,4655.87)
  Bottom Layer w15: 1644.74,3370.22 1672.2,3342.76 1672.2,2744.6 v1(1652.32,2724.72) ; 1644.74,4807.07 1672.2,4779.61 1672.2,4181.45 v1(1652.32,4161.56) ; v1@1865.87,3320.5 1995.02,3320.5 2044.74,3370.22 ; v1@1865.87,4757.35 1995.02,4757.35 2044.74,4807.07 ; 2260.29,3370.22 2287.75,3342.76 2287.75,2744.6 v1(2267.87,2724.72) ; 2260.29,4807.07 2287.75,4779.61 2287.75,4181.45 v1(2267.87,4161.56) ; v1@2481.42,3320.5 2610.57,3320.5 2660.29,3370.22 ; v1@2481.42,4757.35 2610.57,4757.35 2660.29,4807.07 ; 2875.84,3370.22 2903.3,3342.76 2903.3,2744.6 v1(2883.42,2724.72) ; 2875.84,4807.07 2903.3,4779.61 2903.3,4181.45 v1(2883.42,4161.56) ; v1@3096.98,3320.5 3226.12,3320.5 3275.84,3370.22 ; v1@3096.98,4757.35 3226.12,4757.35 3275.84,4807.07 ; 3491.39,3370.22 3518.86,3342.76 3518.86,2744.6 v1(3498.97,2724.72) ; 3491.39,4807.07 3518.86,4779.61 3518.86,4181.45 v1(3498.97,4161.56) ; v1@3712.53,3320.5 3841.67,3320.5 3891.39,3370.22 ; v1@3712.53,4757.35 3841.67,4757.35 3891.39,4807.07 ; 4106.94,3370.22 4134.41,3342.76 4134.41,2744.6 v1(4114.52,2724.72) ; 4106.94,4807.07 4134.41,4779.61 4134.41,4181.45 v1(4114.52,4161.56) ; v1@4328.08,3320.5 4457.22,3320.5 4506.94,3370.22 ; v1@4328.08,4757.35 4457.22,4757.35 4506.94,4807.07 ; 4722.5,3370.22 4749.96,3342.76 4749.96,2744.6 v1(4730.07,2724.72) ; 4722.5,4807.07 4749.96,4779.61 4749.96,4181.45 v1(4730.07,4161.56) ; v1@4943.63,3320.5 5072.78,3320.5 5122.5,3370.22 ; v1@4943.63,4757.35 5072.78,4757.35 5122.5,4807.07
  Bottom Layer w20: 1544.74,3370.22 1544.74,3204.43 1531.12,3190.82 1531.12,2578.82 1519.57,2567.27 1519.57,2364.36 1542.67,2341.27 v1(1745.57,2341.27) ; 1544.74,4807.07 1544.74,4641.28 1531.12,4627.67 1531.12,4015.67 1519.57,4004.12 1519.57,3801.21 1542.67,3778.12 v1(1745.57,3778.12) ; v2(1555.67,2439.94) v2@1555.67,2548.18 ; v2(1555.67,3876.78) v2@1555.67,3985.02 ; v1(1572.9,3143.16) 1572.9,2647.68 1654.94,2565.64 v1(1654.94,2533.7) ; v1(1572.9,4580.01) 1572.9,4084.53 1654.94,4002.49 v1(1654.94,3970.55) ; v1(1609.63,2681.55) v1(1609.63,3272.71) v1@1610.41,3273.49 ; v1(1609.63,4118.4) v1(1609.63,4709.56) v1@1610.41,4710.34 ; 1744.74,3370.22 1744.74,3316.99 1768.04,3293.68 2038.74,3293.68 2059.73,3272.68 v2(2059.73,3139.21) ; 1744.74,4807.07 1744.74,4753.83 1768.04,4730.53 2038.74,4730.53 2059.73,4709.53 v2(2059.73,4576.06) ; 2160.29,3370.22 2160.29,3204.43 2146.68,3190.82 2146.68,2578.82 2135.12,2567.27 2135.12,2364.36 2158.22,2341.27 v1(2361.12,2341.27) ; 2160.29,4807.07 2160.29,4641.28 2146.68,4627.67 2146.68,4015.67 2135.12,4004.12 2135.12,3801.21 2158.22,3778.12 v1(2361.12,3778.12) ; v2(2171.23,2439.94) v2@2171.23,2548.18 ; v2(2171.23,3876.78) v2@2171.23,3985.02 ; v1(2188.45,3143.16) 2188.45,2647.68 2270.49,2565.64 v1(2270.49,2533.7) ; v1(2188.45,4580.01) 2188.45,4084.53 2270.49,4002.49 v1(2270.49,3970.55) ; v1(2225.18,2681.55) v1(2225.18,3272.71) v1@2225.97,3273.49 ; v1(2225.18,4118.4) v1(2225.18,4709.56) v1@2225.97,4710.34 ; 2360.29,3370.22 2360.29,3316.99 2383.6,3293.68 2654.29,3293.68 2675.28,3272.68 v2(2675.28,3139.21) ; 2360.29,4807.07 2360.29,4753.83 2383.6,4730.53 2654.29,4730.53 2675.28,4709.53 v2(2675.28,4576.06) ; 2775.84,3370.22 2775.84,3204.43 2762.23,3190.82 2762.23,2578.82 2750.68,2567.27 2750.68,2364.36 2773.77,2341.27 v1(2976.67,2341.27) ; 2775.84,4807.07 2775.84,4641.28 2762.23,4627.67 2762.23,4015.67 2750.68,4004.12 2750.68,3801.21 2773.77,3778.12 v1(2976.67,3778.12) ; v2(2786.78,2439.94) v2@2786.78,2548.18 ; v2(2786.78,3876.78) v2@2786.78,3985.02 ; v1(2804.01,3143.16) 2804.01,2647.68 2886.05,2565.64 v1(2886.05,2533.7) ; v1(2804.01,4580.01) 2804.01,4084.53 2886.05,4002.49 v1(2886.05,3970.55) ; v1(2840.74,2681.55) v1(2840.74,3272.71) v1@2841.52,3273.49 ; v1(2840.74,4118.4) v1(2840.74,4709.56) v1@2841.52,4710.34 ; 2975.84,3370.22 2975.84,3316.99 2999.15,3293.68 3269.84,3293.68 3290.84,3272.68 v2(3290.84,3139.21) ; 2975.84,4807.07 2975.84,4753.83 2999.15,4730.53 3269.84,4730.53 3290.84,4709.53 v2(3290.84,4576.06) ; 3391.39,3370.22 3391.39,3204.43 3377.78,3190.82 3377.78,2578.82 3366.23,2567.27 3366.23,2364.36 3389.32,2341.27 v1(3592.22,2341.27) ; 3391.39,4807.07 3391.39,4641.28 3377.78,4627.67 3377.78,4015.67 3366.23,4004.12 3366.23,3801.21 3389.32,3778.12 v1(3592.22,3778.12) ; v2(3402.33,2439.94) v2@3402.33,2548.18 ; v2(3402.33,3876.78) v2@3402.33,3985.02 ; v1(3419.56,3143.16) 3419.56,2647.68 3501.6,2565.64 v1(3501.6,2533.7) ; v1(3419.56,4580.01) 3419.56,4084.53 3501.6,4002.49 v1(3501.6,3970.55) ; v1(3456.29,2681.55) v1(3456.29,3272.71) v1@3457.07,3273.49 ; v1(3456.29,4118.4) v1(3456.29,4709.56) v1@3457.07,4710.34 ; 3591.39,3370.22 3591.39,3316.99 3614.7,3293.68 3885.39,3293.68 3906.39,3272.68 v2(3906.39,3139.21) ; 3591.39,4807.07 3591.39,4753.83 3614.7,4730.53 3885.39,4730.53 3906.39,4709.53 v2(3906.39,4576.06) ; 4006.95,3370.22 4006.95,3204.43 3993.33,3190.82 3993.33,2578.82 3981.78,2567.27 3981.78,2364.36 4004.87,2341.27 v1(4207.78,2341.27) ; 4006.95,4807.07 4006.95,4641.28 3993.33,4627.67 3993.33,4015.67 3981.78,4004.12 3981.78,3801.21 4004.87,3778.12 v1(4207.78,3778.12) ; v2(4017.88,2439.94) v2@4017.88,2548.18 ; v2(4017.88,3876.78) v2@4017.88,3985.02 ; v1(4035.11,3143.16) 4035.11,2647.68 4117.15,2565.64 v1(4117.15,2533.7) ; v1(4035.11,4580.01) 4035.11,4084.53 4117.15,4002.49 v1(4117.15,3970.55) ; v1(4071.84,2681.55) v1(4071.84,3272.71) v1@4072.62,3273.49 ; v1(4071.84,4118.4) v1(4071.84,4709.56) v1@4072.62,4710.34 ; 4206.94,3370.22 4206.94,3316.99 4230.25,3293.68 4500.94,3293.68 4521.94,3272.68 v2(4521.94,3139.21) ; 4206.94,4807.07 4206.94,4753.83 4230.25,4730.53 4500.94,4730.53 4521.94,4709.53 v2(4521.94,4576.06) ; 4622.5,3370.22 4622.5,3204.43 4608.88,3190.82 4608.88,2578.82 4597.33,2567.27 4597.33,2364.36 4620.43,2341.27 v1(4823.33,2341.27) ; 4622.5,4807.07 4622.5,4641.28 4608.88,4627.67 4608.88,4015.67 4597.33,4004.12 4597.33,3801.21 4620.43,3778.12 v1(4823.33,3778.12) ; v2(4633.43,2439.94) v2@4633.43,2548.18 ; v2(4633.43,3876.78) v2@4633.43,3985.02 ; v1(4650.66,3143.16) 4650.66,2647.68 4732.7,2565.64 v1(4732.7,2533.7) ; v1(4650.66,4580.01) 4650.66,4084.53 4732.7,4002.49 v1(4732.7,3970.55) ; v1(4687.39,2681.55) v1(4687.39,3272.71) v1@4688.18,3273.49 ; v1(4687.39,4118.4) v1(4687.39,4709.56) v1@4688.18,4710.34 ; 4822.5,3370.22 4822.5,3316.99 4845.8,3293.68 5116.5,3293.68 5137.49,3272.68 v2(5137.49,3139.21) ; 4822.5,4807.07 4822.5,4753.83 4845.8,4730.53 5116.5,4730.53 5137.49,4709.53 v2(5137.49,4576.06)
  other v1: 1529.41,2037.48 2077.65,2037.48 2144.96,2037.48 2693.2,2037.48 2760.52,2037.48 3308.75,2037.48 3376.07,2037.48 3924.3,2037.48 3991.62,2037.48 4539.85,2037.48 4607.17,2037.48 5155.41,2037.48 1529.41,2106.32 2144.96,2106.32 2760.52,2106.32 3376.07,2106.32 3991.62,2106.32 4607.17,2106.32 2074.02,2108.73 2689.57,2108.73 3305.13,2108.73 3920.68,2108.73 4536.23,2108.73 5151.78,2108.73 2077.65,2172.73 2693.2,2172.73 3308.75,2172.73 3924.3,2172.73 4539.85,2172.73 5155.41,2172.73 1529.41,2177.56 2144.96,2177.56 2760.52,2177.56 3376.07,2177.56 3991.62,2177.56 4607.17,2177.56 2074.02,2241.56 2689.57,2241.56 3305.13,2241.56 3920.68,2241.56 4536.23,2241.56 5151.78,2241.56 1530.62,2245.19 2146.17,2245.19 2761.72,2245.19 3377.28,2245.19 3992.83,2245.19 4608.38,2245.19 1906.99,2256.12 2522.55,2256.12 3138.1,2256.12 3753.65,2256.12 4369.2,2256.12 4984.75,2256.12 1907.68,2297.15 2523.24,2297.15 3138.79,2297.15 3754.34,2297.15 4369.89,2297.15 4985.44,2297.15 1662.22,2341.27 1686.55,2341.27 1710.87,2341.27 2277.77,2341.27 2302.1,2341.27 2326.43,2341.27 2893.32,2341.27 2917.65,2341.27 2941.98,2341.27 3508.88,2341.27 3533.2,2341.27 3557.53,2341.27 4124.43,2341.27 4148.76,2341.27 4173.08,2341.27 4739.98,2341.27 4764.31,2341.27 4788.63,2341.27 2018.1,2346.72 2055.84,2346.72 2633.65,2346.72 2671.39,2346.72 3249.2,2346.72 3286.95,2346.72 3864.76,2346.72 3902.5,2346.72 4480.31,2346.72 4518.05,2346.72 5095.86,2346.72 5133.6,2346.72 2017.52,2410.01 2633.07,2410.01 3248.63,2410.01 3864.18,2410.01 4479.73,2410.01 5095.28,2410.01 2056.38,2411.38 2671.93,2411.38 3287.48,2411.38 3903.03,2411.38 4518.58,2411.38 5134.14,2411.38 1811.58,2430.24 2427.13,2430.24 3042.68,2430.24 3658.24,2430.24 4273.79,2430.24 4889.34,2430.24 1529.41,3474.33 2077.65,3474.33 2144.96,3474.33 2693.2,3474.33 2760.52,3474.33 3308.75,3474.33 3376.07,3474.33 3924.3,3474.33 3991.62,3474.33 4539.85,3474.33 4607.17,3474.33 5155.41,3474.33 1529.41,3543.16 2144.96,3543.16 2760.52,3543.16 3376.07,3543.16 3991.62,3543.16 4607.17,3543.16 2074.02,3545.58 2689.57,3545.58 3305.13,3545.58 3920.68,3545.58 4536.23,3545.58 5151.78,3545.58 2077.65,3609.58 2693.2,3609.58 3308.75,3609.58 3924.3,3609.58 4539.85,3609.58 5155.41,3609.58 1529.41,3614.41 2144.96,3614.41 2760.52,3614.41 3376.07,3614.41 3991.62,3614.41 4607.17,3614.41 2074.02,3678.41 2689.57,3678.41 3305.13,3678.41 3920.68,3678.41 4536.23,3678.41 5151.78,3678.41 1530.62,3682.03 2146.17,3682.03 2761.72,3682.03 3377.28,3682.03 3992.83,3682.03 4608.38,3682.03 1906.99,3692.97 2522.55,3692.97 3138.1,3692.97 3753.65,3692.97 4369.2,3692.97 4984.75,3692.97 1907.68,3734 2523.24,3734 3138.79,3734 3754.34,3734 4369.89,3734 4985.44,3734 1662.22,3778.12 1686.55,3778.12 1710.87,3778.12 2277.77,3778.12 2302.1,3778.12 2326.43,3778.12 2893.32,3778.12 2917.65,3778.12 2941.98,3778.12 3508.88,3778.12 3533.2,3778.12 3557.53,3778.12 4124.43,3778.12 4148.76,3778.12 4173.08,3778.12 4739.98,3778.12 4764.31,3778.12 4788.63,3778.12 2018.1,3783.57 2055.84,3783.57 2633.65,3783.57 2671.39,3783.57 3249.2,3783.57 3286.95,3783.57 3864.76,3783.57 3902.5,3783.57 4480.31,3783.57 4518.05,3783.57 5095.86,3783.57 5133.6,3783.57 2017.52,3846.86 2633.07,3846.86 3248.63,3846.86 3864.18,3846.86 4479.73,3846.86 5095.28,3846.86 2056.38,3848.22 2671.93,3848.22 3287.48,3848.22 3903.03,3848.22 4518.58,3848.22 5134.14,3848.22 1811.58,3867.09 2427.13,3867.09 3042.68,3867.09 3658.24,3867.09 4273.79,3867.09 4889.34,3867.09
  other v2: 1556.26,2548.18 2171.81,2548.18 2787.36,2548.18 3402.91,2548.18 4018.47,2548.18 4634.02,2548.18 1556.26,3985.02 2171.81,3985.02 2787.36,3985.02 3402.91,3985.02 4018.47,3985.02 4634.02,3985.02

## Polygon pours and split planes (outlines as drawn)
no net on Bottom Layer "Bottom Layer-No Net" (solid, remove dead copper): 4567.76,3430 5183.31,3430 5183.31,1993.15 4567.76,1993.15 4567.76,3430
no net on Bottom Layer "Bottom Layer-No Net" (solid, remove dead copper): 3952.21,3430 4567.76,3430 4567.76,1993.15 3952.21,1993.15 3952.21,3430
no net on Bottom Layer "Bottom Layer-No Net" (solid, remove dead copper): 3336.66,3430 3952.21,3430 3952.21,1993.15 3336.66,1993.15 3336.66,3430
no net on Bottom Layer "Bottom Layer-No Net" (solid, remove dead copper): 2721.1,3430 3336.66,3430 3336.66,1993.15 2721.1,1993.15 2721.1,3430
no net on Bottom Layer "Bottom Layer-No Net" (solid, remove dead copper): 2105.55,3430 2721.1,3430 2721.1,1993.15 2105.55,1993.15 2105.55,3430
no net on Bottom Layer "Bottom Layer-No Net" (solid, remove dead copper): 1490,3430 2105.55,3430 2105.55,1993.15 1490,1993.15 1490,3430
no net on Bottom Layer "Bottom Layer-No Net" (solid, remove dead copper): 4567.76,4866.85 5183.31,4866.85 5183.31,3430 4567.76,3430 4567.76,4866.85
no net on Bottom Layer "Bottom Layer-No Net" (solid, remove dead copper): 3952.21,4866.85 4567.76,4866.85 4567.76,3430 3952.21,3430 3952.21,4866.85
no net on Bottom Layer "Bottom Layer-No Net" (solid, remove dead copper): 3336.66,4866.85 3952.21,4866.85 3952.21,3430 3336.66,3430 3336.66,4866.85
no net on Bottom Layer "Bottom Layer-No Net" (solid, remove dead copper): 2721.1,4866.85 3336.66,4866.85 3336.66,3430 2721.1,3430 2721.1,4866.85
no net on Bottom Layer "Bottom Layer-No Net" (solid, remove dead copper): 2105.55,4866.85 2721.1,4866.85 2721.1,3430 2105.55,3430 2105.55,4866.85
no net on Bottom Layer "Bottom Layer-No Net" (solid, remove dead copper): 1490,4866.85 2105.55,4866.85 2105.55,3430 1490,3430 1490,4866.85
no net on Top Layer "Bottom Layer-No Net" (solid, remove dead copper): 4567.76,3430 5183.31,3430 5183.31,1993.15 4567.76,1993.15 4567.76,3430
no net on Top Layer "Bottom Layer-No Net" (solid, remove dead copper): 3952.21,3430 4567.76,3430 4567.76,1993.15 3952.21,1993.15 3952.21,3430
no net on Top Layer "Bottom Layer-No Net" (solid, remove dead copper): 3336.66,3430 3952.21,3430 3952.21,1993.15 3336.66,1993.15 3336.66,3430
no net on Top Layer "Bottom Layer-No Net" (solid, remove dead copper): 2721.1,3430 3336.66,3430 3336.66,1993.15 2721.1,1993.15 2721.1,3430
no net on Top Layer "Bottom Layer-No Net" (solid, remove dead copper): 2105.55,3430 2721.1,3430 2721.1,1993.15 2105.55,1993.15 2105.55,3430
no net on Top Layer "Bottom Layer-No Net" (solid, remove dead copper): 1490,3430 2105.55,3430 2105.55,1993.15 1490,1993.15 1490,3430
no net on Top Layer "Bottom Layer-No Net" (solid, remove dead copper): 4567.76,4866.85 5183.31,4866.85 5183.31,3430 4567.76,3430 4567.76,4866.85
no net on Top Layer "Bottom Layer-No Net" (solid, remove dead copper): 3952.21,4866.85 4567.76,4866.85 4567.76,3430 3952.21,3430 3952.21,4866.85
no net on Top Layer "Bottom Layer-No Net" (solid, remove dead copper): 3336.66,4866.85 3952.21,4866.85 3952.21,3430 3336.66,3430 3336.66,4866.85
no net on Top Layer "Bottom Layer-No Net" (solid, remove dead copper): 2721.1,4866.85 3336.66,4866.85 3336.66,3430 2721.1,3430 2721.1,4866.85
no net on Top Layer "Bottom Layer-No Net" (solid, remove dead copper): 2105.55,4866.85 2721.1,4866.85 2721.1,3430 2105.55,3430 2105.55,4866.85
no net on Top Layer "Bottom Layer-No Net" (solid, remove dead copper): 1490,4866.85 2105.55,4866.85 2105.55,3430 1490,3430 1490,4866.85

## Keep-outs
Keep-Out Layer:
  lines w5: 5156.46,1993.15 5028.26,1993.15 ; 5183.31,2020 5183.31,3430 ; 1490,1993.15 1490,4866.85 ; 1490,1993.15 5183.31,1993.15 5183.31,4866.85 ; 1490,1993.15 1490,3430 ; 1490,1993.15 1651.29,1993.15 ; 1490,3430 2105.55,3430 ; 1490,3430 1490,4866.85 ; 1490,3430 1651.29,3430 ; 1490,4866.85 5183.31,4866.85 ; 1490,4866.85 2105.55,4866.85 ; 1651.29,1993.15 1651.29,2212.37 ; 1651.29,1993.15 1651.29,2212.37 ; 1651.29,1993.15 1651.29,2212.37 ; 1651.29,1993.15 1651.29,2212.37 ; 1651.29,2212.37 cw(c1663.1,2212.37) 1663.1,2224.18 1679.56,2224.18 cw(c1679.56,2212.37) 1685.55,2222.55 1713.47,2206.13 ccw(c1719.46,2216.31) 1719.46,2204.5 1882.32,2204.5 ccw(c1882.32,2216.31) 1888.31,2206.13 1916.23,2222.55 cw(c1922.22,2212.37) 1922.22,2224.18 1938.69,2224.18 cw(c1938.69,2212.37) 1950.5,2212.37 ; 1651.29,3430 1651.29,3649.22 ; 1651.29,3430 1651.29,3649.22 ; 1651.29,3430 1651.29,3649.22 ; 1651.29,3430 1651.29,3649.22 ; 1651.29,3649.22 cw(c1663.1,3649.22) 1663.1,3661.03 1679.56,3661.03 cw(c1679.56,3649.22) 1685.55,3659.4 1713.47,3642.98 ccw(c1719.46,3653.16) 1719.46,3641.35 1882.32,3641.35 ccw(c1882.32,3653.16) 1888.31,3642.98 1916.23,3659.4 cw(c1922.22,3649.22) 1922.22,3661.03 1938.69,3661.03 cw(c1938.69,3649.22) 1950.5,3649.22 ; 1950.5,1993.15 1950.5,2212.37 ; 1950.5,1993.15 1950.5,2212.37 ; 1950.5,1993.15 2105.55,1993.15 ; 1950.5,3430 1950.5,3649.22 ; 1950.5,3430 1950.5,3649.22 ; 1950.5,3430 2105.55,3430 ; 2105.55,1993.15 2105.55,3430 ; 2105.55,1993.15 2266.84,1993.15 ; 2105.55,1993.15 2105.55,3430 ; 2105.55,3430 2721.1,3430 ; 2105.55,3430 2105.55,4866.85 ; 2105.55,3430 2266.84,3430 ; 2105.55,3430 2105.55,4866.85 ; 2105.55,4866.85 2721.1,4866.85 ; 2266.84,1993.15 2266.84,2212.37 ; 2266.84,1993.15 2266.84,2212.37 ; 2266.84,1993.15 2266.84,2212.37 ; 2266.84,1993.15 2266.84,2212.37 ; 2266.84,2212.37 cw(c2278.65,2212.37) 2278.65,2224.18 2295.12,2224.18 cw(c2295.12,2212.37) 2301.11,2222.55 2329.03,2206.13 ccw(c2335.01,2216.31) 2335.01,2204.5 2497.87,2204.5 ccw(c2497.87,2216.31) 2503.86,2206.13 2531.78,2222.55 cw(c2537.77,2212.37) 2537.77,2224.18 2554.24,2224.18 cw(c2554.24,2212.37) 2566.05,2212.37 ; 2266.84,3430 2266.84,3649.22 ; 2266.84,3430 2266.84,3649.22 ; 2266.84,3430 2266.84,3649.22 ; 2266.84,3430 2266.84,3649.22 ; 2266.84,3649.22 cw(c2278.65,3649.22) 2278.65,3661.03 2295.12,3661.03 cw(c2295.12,3649.22) 2301.11,3659.4 2329.03,3642.98 ccw(c2335.01,3653.16) 2335.01,3641.35 2497.87,3641.35 ccw(c2497.87,3653.16) 2503.86,3642.98 2531.78,3659.4 cw(c2537.77,3649.22) 2537.77,3661.03 2554.24,3661.03 cw(c2554.24,3649.22) 2566.05,3649.22 ; 2566.05,1993.15 2566.05,2212.37 ; 2566.05,1993.15 2566.05,2212.37 ; 2566.05,1993.15 2721.1,1993.15 ; 2566.05,3430 2566.05,3649.22 ; 2566.05,3430 2566.05,3649.22 ; 2566.05,3430 2721.1,3430 ; 2721.1,1993.15 2721.1,3430 ; 2721.1,1993.15 2882.39,1993.15 ; 2721.1,1993.15 2721.1,3430 ; 2721.1,3430 3336.66,3430 ; 2721.1,3430 2721.1,4866.85 ; 2721.1,3430 2882.39,3430 ; 2721.1,3430 2721.1,4866.85 ; 2721.1,4866.85 3336.66,4866.85 ; 2882.39,1993.15 2882.39,2212.37 ; 2882.39,1993.15 2882.39,2212.37 ; 2882.39,1993.15 2882.39,2212.37 ; 2882.39,1993.15 2882.39,2212.37 ; 2882.39,2212.37 cw(c2894.2,2212.37) 2894.2,2224.18 2910.67,2224.18 cw(c2910.67,2212.37) 2916.66,2222.55 2944.58,2206.13 ccw(c2950.57,2216.31) 2950.57,2204.5 3113.42,2204.5 ccw(c3113.42,2216.31) 3119.41,2206.13 3147.33,2222.55 cw(c3153.32,2212.37) 3153.32,2224.18 3169.79,2224.18 cw(c3169.79,2212.37) 3181.6,2212.37 ; 2882.39,3430 2882.39,3649.22 ; 2882.39,3430 2882.39,3649.22 ; 2882.39,3430 2882.39,3649.22 ; 2882.39,3430 2882.39,3649.22 ; 2882.39,3649.22 cw(c2894.2,3649.22) 2894.2,3661.03 2910.67,3661.03 cw(c2910.67,3649.22) 2916.66,3659.4 2944.58,3642.98 ccw(c2950.57,3653.16) 2950.57,3641.35 3113.42,3641.35 ccw(c3113.42,3653.16) 3119.41,3642.98 3147.33,3659.4 cw(c3153.32,3649.22) 3153.32,3661.03 3169.79,3661.03 cw(c3169.79,3649.22) 3181.6,3649.22 ; 3181.6,1993.15 3181.6,2212.37 ; 3181.6,1993.15 3181.6,2212.37 ; 3181.6,1993.15 3336.66,1993.15 ; 3181.6,3430 3181.6,3649.22 ; 3181.6,3430 3181.6,3649.22 ; 3181.6,3430 3336.66,3430 ; 3336.66,1993.15 3336.66,3430 ; 3336.66,1993.15 3497.94,1993.15 ; 3336.66,1993.15 3336.66,3430 ; 3336.66,3430 3952.21,3430 ; 3336.66,3430 3336.66,4866.85 ; 3336.66,3430 3497.94,3430 ; 3336.66,3430 3336.66,4866.85 ; 3336.66,4866.85 3952.21,4866.85 ; 3497.94,1993.15 3497.94,2212.37 ; 3497.94,1993.15 3497.94,2212.37 ; 3497.94,1993.15 3497.94,2212.37 ; 3497.94,1993.15 3497.94,2212.37 ; 3497.94,2212.37 cw(c3509.75,2212.37) 3509.75,2224.18 3526.22,2224.18 cw(c3526.22,2212.37) 3532.21,2222.55 3560.13,2206.13 ccw(c3566.12,2216.31) 3566.12,2204.5 3728.98,2204.5 ccw(c3728.98,2216.31) 3734.97,2206.13 3762.89,2222.55 cw(c3768.87,2212.37) 3768.87,2224.18 3785.34,2224.18 cw(c3785.34,2212.37) 3797.15,2212.37 ; 3497.94,3430 3497.94,3649.22 ; 3497.94,3430 3497.94,3649.22 ; 3497.94,3430 3497.94,3649.22 ; 3497.94,3430 3497.94,3649.22 ; 3497.94,3649.22 cw(c3509.75,3649.22) 3509.75,3661.03 3526.22,3661.03 cw(c3526.22,3649.22) 3532.21,3659.4 3560.13,3642.98 ccw(c3566.12,3653.16) 3566.12,3641.35 3728.98,3641.35 ccw(c3728.98,3653.16) 3734.97,3642.98 3762.89,3659.4 cw(c3768.87,3649.22) 3768.87,3661.03 3785.34,3661.03 cw(c3785.34,3649.22) 3797.15,3649.22 ; 3797.15,1993.15 3797.15,2212.37 ; 3797.15,1993.15 3797.15,2212.37 ; 3797.15,1993.15 3952.21,1993.15 ; 3797.15,3430 3797.15,3649.22 ; 3797.15,3430 3797.15,3649.22 ; 3797.15,3430 3952.21,3430 ; 3952.21,1993.15 3952.21,3430 ; 3952.21,1993.15 4113.49,1993.15 ; 3952.21,1993.15 3952.21,3430 ; 3952.21,3430 4567.76,3430 ; 3952.21,3430 3952.21,4866.85 ; 3952.21,3430 4113.49,3430 ; 3952.21,3430 3952.21,4866.85 ; 3952.21,4866.85 4567.76,4866.85 ; 4113.49,1993.15 4113.49,2212.37 ; 4113.49,1993.15 4113.49,2212.37 ; 4113.49,1993.15 4113.49,2212.37 ; 4113.49,1993.15 4113.49,2212.37 ; 4113.49,2212.37 cw(c4125.3,2212.37) 4125.3,2224.18 4141.77,2224.18 cw(c4141.77,2212.37) 4147.76,2222.55 4175.68,2206.13 ccw(c4181.67,2216.31) 4181.67,2204.5 4344.53,2204.5 ccw(c4344.53,2216.31) 4350.52,2206.13 4378.44,2222.55 cw(c4384.43,2212.37) 4384.43,2224.18 4400.89,2224.18 cw(c4400.89,2212.37) 4412.71,2212.37 ; 4113.49,3430 4113.49,3649.22 ; 4113.49,3430 4113.49,3649.22 ; 4113.49,3430 4113.49,3649.22 ; 4113.49,3430 4113.49,3649.22 ; 4113.49,3649.22 cw(c4125.3,3649.22) 4125.3,3661.03 4141.77,3661.03 cw(c4141.77,3649.22) 4147.76,3659.4 4175.68,3642.98 ccw(c4181.67,3653.16) 4181.67,3641.35 4344.53,3641.35 ccw(c4344.53,3653.16) 4350.52,3642.98 4378.44,3659.4 cw(c4384.43,3649.22) 4384.43,3661.03 4400.89,3661.03 cw(c4400.89,3649.22) 4412.71,3649.22 ; 4412.71,1993.15 4412.71,2212.37 ; 4412.71,1993.15 4412.71,2212.37 ; 4412.71,1993.15 4567.76,1993.15 ; 4412.71,3430 4412.71,3649.22 ; 4412.71,3430 4412.71,3649.22 ; 4412.71,3430 4567.76,3430 ; 4567.76,1993.15 4567.76,3430 ; 4567.76,1993.15 4729.05,1993.15 ; 4567.76,1993.15 4567.76,3430 ; 4567.76,3430 5183.31,3430 ; 4567.76,3430 4567.76,4866.85 ; 4567.76,3430 4729.05,3430 ; 4567.76,3430 4567.76,4866.85 ; 4567.76,4866.85 5183.31,4866.85 ; 4729.05,1993.15 4729.05,2212.37 ; 4729.05,1993.15 4729.05,2212.37 ; 4729.05,1993.15 4729.05,2212.37 ; 4729.05,1993.15 4729.05,2212.37 ; 4729.05,2212.37 cw(c4740.86,2212.37) 4740.86,2224.18 4757.32,2224.18 cw(c4757.32,2212.37) 4763.31,2222.55 4791.23,2206.13 ccw(c4797.22,2216.31) 4797.22,2204.5 4960.08,2204.5 ccw(c4960.08,2216.31) 4966.07,2206.13 4993.99,2222.55 cw(c4999.98,2212.37) 4999.98,2224.18 5016.45,2224.18 cw(c5016.45,2212.37) 5028.26,2212.37 ; 4729.05,3430 4729.05,3649.22 ; 4729.05,3430 4729.05,3649.22 ; 4729.05,3430 4729.05,3649.22 ; 4729.05,3430 4729.05,3649.22 ; 4729.05,3649.22 cw(c4740.86,3649.22) 4740.86,3661.03 4757.32,3661.03 cw(c4757.32,3649.22) 4763.31,3659.4 4791.23,3642.98 ccw(c4797.22,3653.16) 4797.22,3641.35 4960.08,3641.35 ccw(c4960.08,3653.16) 4966.07,3642.98 4993.99,3659.4 cw(c4999.98,3649.22) 4999.98,3661.03 5016.45,3661.03 cw(c5016.45,3649.22) 5028.26,3649.22 ; 5028.26,1993.15 5028.26,2212.37 ; 5028.26,1993.15 5028.26,2212.37 ; 5028.26,3430 5028.26,3649.22 ; 5028.26,3430 5028.26,3649.22 ; 5028.26,3430 5183.31,3430 ; 5183.31,3430 5183.31,4866.85